# EAGLE board LTC4150_BOB-Panel-v10 (EAGLE 6.5.0), part 1 of 2
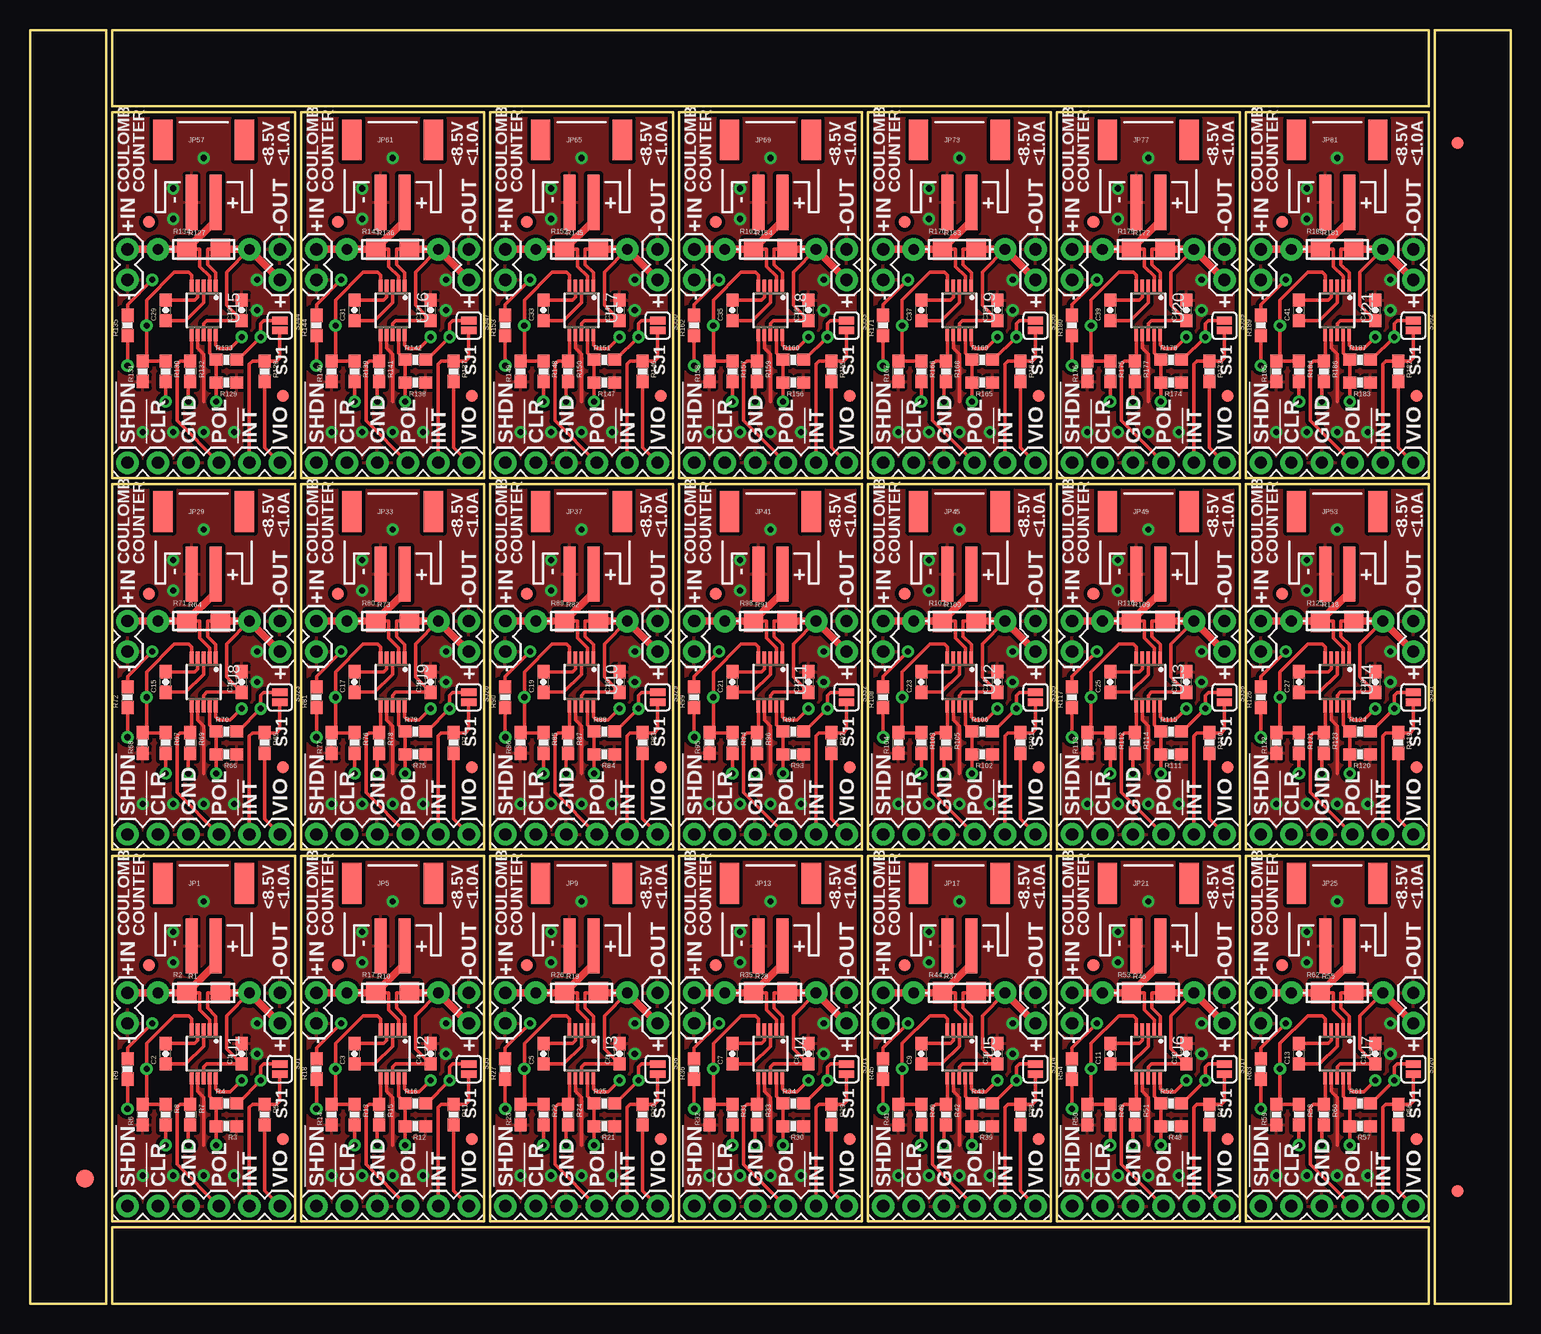
[diagram p0: board, top side]
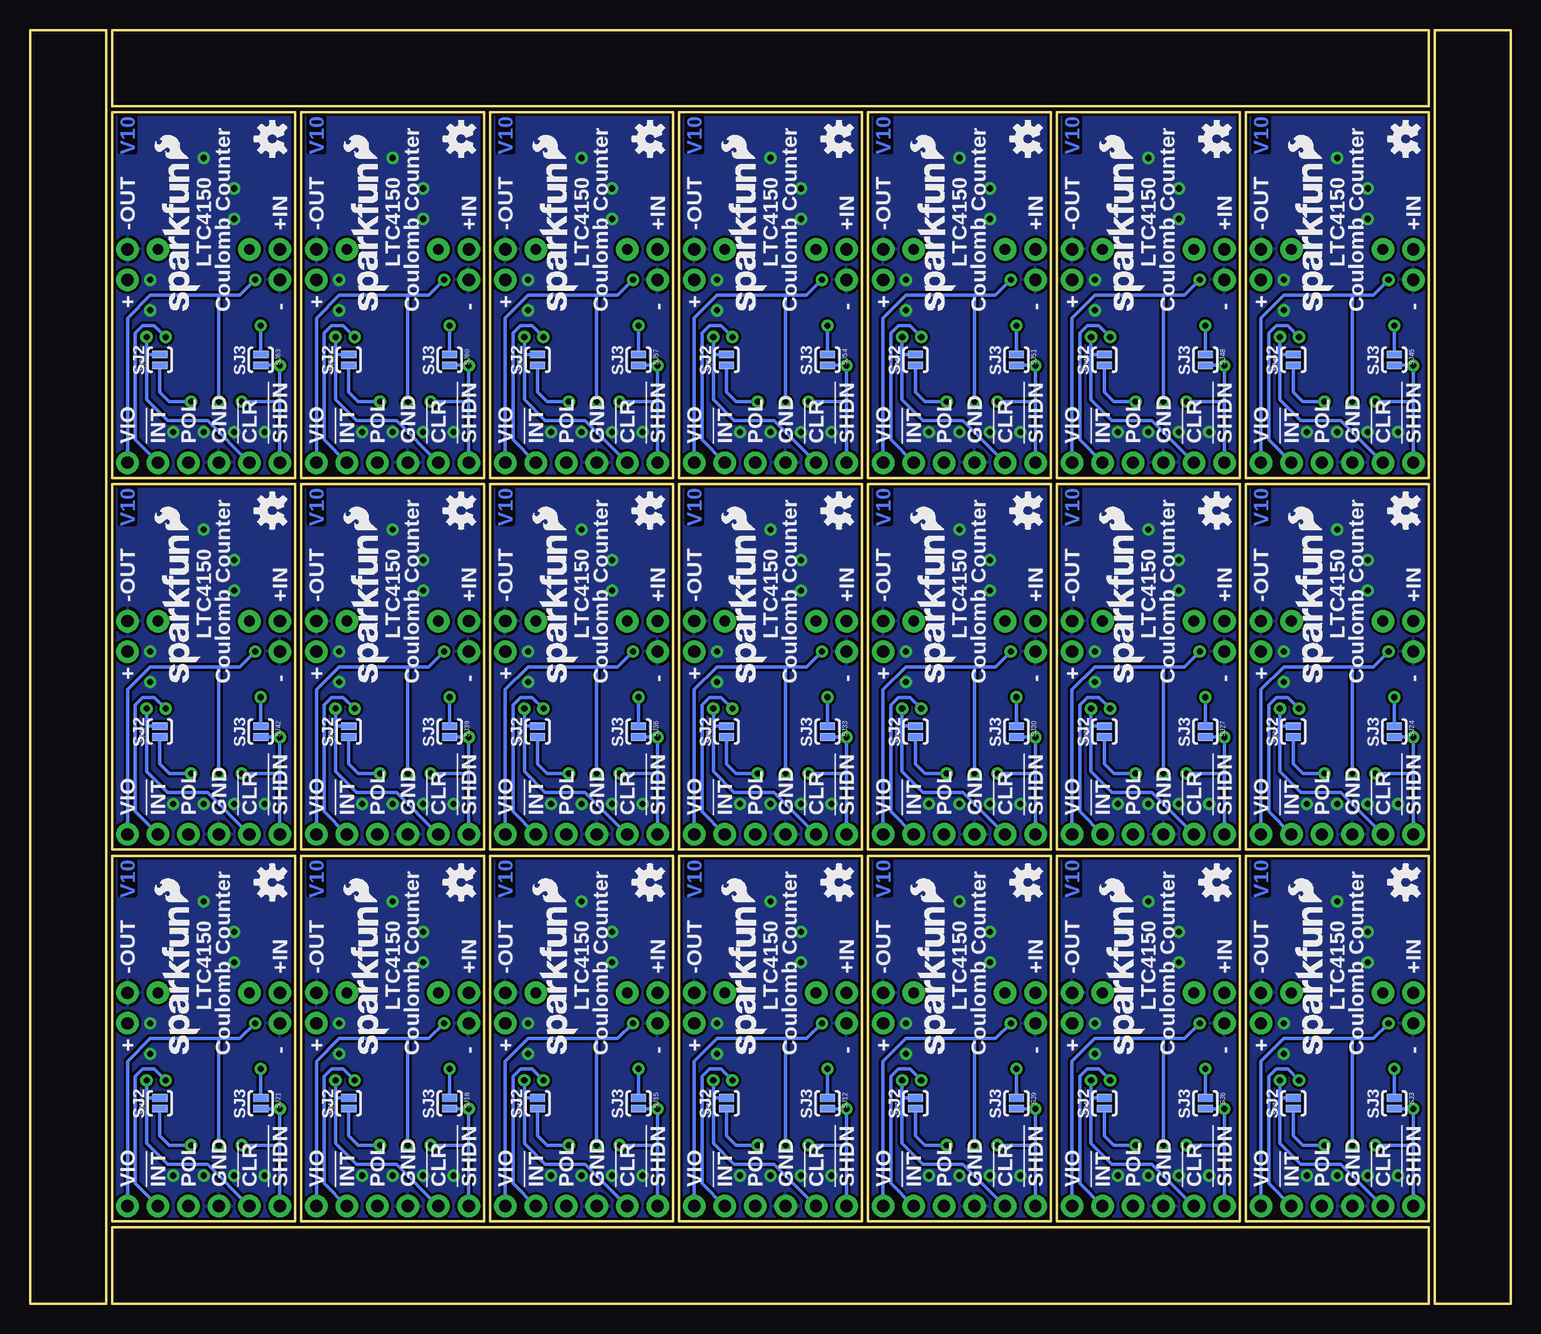
[diagram p1: board, bottom side, seen from below]

Size 123.44 x 106.17 mm. Coordinates in mm from the lower left corner, seen from the top.
Outline: 6.35,79.25 6.35,0 0,0 0,29.72
Outline: 123.44,79.25 123.44,0 117.09,0 117.09,29.72
Outline: 117.09,26.92 117.09,106.17 123.44,106.17 123.44,76.45
Outline: 0,26.92 0,106.17 6.35,106.17 6.35,76.45
Outline: 6.86,6.86 22.1,6.86 22.1,37.34 6.86,37.34 6.86,6.86
Outline: 22.61,6.86 37.85,6.86 37.85,37.34 22.61,37.34 22.61,6.86
Outline: 38.35,6.86 53.59,6.86 53.59,37.34 38.35,37.34 38.35,6.86
Outline: 54.1,6.86 69.34,6.86 69.34,37.34 54.1,37.34 54.1,6.86
Outline: 69.85,6.86 85.09,6.86 85.09,37.34 69.85,37.34 69.85,6.86
Outline: 85.6,6.86 100.84,6.86 100.84,37.34 85.6,37.34 85.6,6.86
Outline: 101.35,6.86 116.59,6.86 116.59,37.34 101.35,37.34 101.35,6.86
Outline: 6.86,37.85 22.1,37.85 22.1,68.33 6.86,68.33 6.86,37.85
Outline: 22.61,37.85 37.85,37.85 37.85,68.33 22.61,68.33 22.61,37.85
Outline: 38.35,37.85 53.59,37.85 53.59,68.33 38.35,68.33 38.35,37.85
Outline: 54.1,37.85 69.34,37.85 69.34,68.33 54.1,68.33 54.1,37.85
Outline: 69.85,37.85 85.09,37.85 85.09,68.33 69.85,68.33 69.85,37.85
Outline: 85.6,37.85 100.84,37.85 100.84,68.33 85.6,68.33 85.6,37.85
Outline: 101.35,37.85 116.59,37.85 116.59,68.33 101.35,68.33 101.35,37.85
Outline: 6.86,68.83 22.1,68.83 22.1,99.31 6.86,99.31 6.86,68.83
Outline: 22.61,68.83 37.85,68.83 37.85,99.31 22.61,99.31 22.61,68.83
Outline: 38.35,68.83 53.59,68.83 53.59,99.31 38.35,99.31 38.35,68.83
Outline: 54.1,68.83 69.34,68.83 69.34,99.31 54.1,99.31 54.1,68.83
Outline: 69.85,68.83 85.09,68.83 85.09,99.31 69.85,99.31 69.85,68.83
Outline: 85.6,68.83 100.84,68.83 100.84,99.31 85.6,99.31 85.6,68.83
Outline: 101.35,68.83 116.59,68.83 116.59,99.31 101.35,99.31 101.35,68.83
Outline: 6.86,0 116.59,0 116.59,6.35 6.86,6.35 6.86,0
Outline: 116.59,106.17 6.86,106.17 6.86,99.82 116.59,99.82 116.59,106.17
Copper layers (1*16): Top 0.035mm / dielectric 1.5mm / Bottom 0.035mm
Design rules "SparkFun *": minimum track width 7mil, minimum drill 15mil, track to track 8mil, track to pad 8mil, pad to pad 8mil, via to via 8mil, smd to smd 8mil, copper to edge 8mil, drill to drill 8mil, minimum pad ring 12mil, minimum via ring 10mil, stop-mask expansion 4mil, vias tented up to drill 20mil, thermal gap 10mil

## Footprints (pad centres in the part's own frame; a part is rotated, then mirrored left to right if it is on the bottom)
0603-CAP = smd 1.1 x 1: 1 -0.85,0; 2 0.85,0
FIDUCIAL-1.5X3 = smd 1.5 x 1.5: 1 0,0
FIDUCIAL-1X2 = smd 1 x 1: 1 0,0
JST-2-SMD = smd 1 x 4.6: 1 -1,-3.7; 2 1,-3.7 | smd 1.6 x 3.4: NC1 -3.4,1.5; NC2 3.4,1.5
1X02 = drill 1.016 pad 1.88: 1 0,0; 2 2.54,0
1X06 = drill 1.016 pad 1.88: 1 0,0; 2 2.54,0; 3 5.08,0; 4 7.62,0; 5 10.16,0; 6 12.7,0
1206 = smd 1.6 x 1.8: 1 -1.4,0; 2 1.4,0
AXIAL-0.3 = drill 0.9 pad 1.88: P$1 -3.81,0; P$2 3.81,0
0603-RES = smd 1.1 x 1: 1 -0.85,0; 2 0.85,0
SJ_2S = smd 0.635 x 1.27: 1 -0.412,0; 2 0.412,0
SJ_2S-NO = smd 0.635 x 1.27: 1 -0.45,0; 2 0.45,0
MSOP10 = smd 0.3 x 1: 1 -1,-2.05; 2 -0.5,-2.05; 3 0,-2.05; 4 0.5,-2.05; 5 1,-2.05; 6 1,2.05; 7 0.5,2.05; 8 0,2.05; 9 -0.5,2.05; 10 -1,2.05

## Placement (x,y rotation side)
C1  4.7uF  [0603-CAP]  17.65,20.83 90 top
C2  4.7uF  [0603-CAP]  11.3,20.83 90 top
C3  4.7uF  [0603-CAP]  27.05,20.83 90 top
C4  4.7uF  [0603-CAP]  33.4,20.83 90 top
C5  4.7uF  [0603-CAP]  42.8,20.83 90 top
C6  4.7uF  [0603-CAP]  49.15,20.83 90 top
C7  4.7uF  [0603-CAP]  58.55,20.83 90 top
C8  4.7uF  [0603-CAP]  64.9,20.83 90 top
C9  4.7uF  [0603-CAP]  74.3,20.83 90 top
C10  4.7uF  [0603-CAP]  80.64,20.83 90 top
C11  4.7uF  [0603-CAP]  90.04,20.83 90 top
C12  4.7uF  [0603-CAP]  96.39,20.83 90 top
C13  4.7uF  [0603-CAP]  105.79,20.83 90 top
C14  4.7uF  [0603-CAP]  112.14,20.83 90 top
C15  4.7uF  [0603-CAP]  11.3,51.82 90 top
C16  4.7uF  [0603-CAP]  17.65,51.82 90 top
C17  4.7uF  [0603-CAP]  27.05,51.82 90 top
C18  4.7uF  [0603-CAP]  33.4,51.82 90 top
C19  4.7uF  [0603-CAP]  42.8,51.82 90 top
C20  4.7uF  [0603-CAP]  49.15,51.82 90 top
C21  4.7uF  [0603-CAP]  58.55,51.82 90 top
C22  4.7uF  [0603-CAP]  64.9,51.82 90 top
C23  4.7uF  [0603-CAP]  74.3,51.82 90 top
C24  4.7uF  [0603-CAP]  80.64,51.82 90 top
C25  4.7uF  [0603-CAP]  90.04,51.82 90 top
C26  4.7uF  [0603-CAP]  96.39,51.82 90 top
C27  4.7uF  [0603-CAP]  105.79,51.82 90 top
C28  4.7uF  [0603-CAP]  112.14,51.82 90 top
C29  4.7uF  [0603-CAP]  11.3,82.8 90 top
C30  4.7uF  [0603-CAP]  17.65,82.8 90 top
C31  4.7uF  [0603-CAP]  27.05,82.8 90 top
C32  4.7uF  [0603-CAP]  33.4,82.8 90 top
C33  4.7uF  [0603-CAP]  42.8,82.8 90 top
C34  4.7uF  [0603-CAP]  49.15,82.8 90 top
C35  4.7uF  [0603-CAP]  58.55,82.8 90 top
C36  4.7uF  [0603-CAP]  64.9,82.8 90 top
C37  4.7uF  [0603-CAP]  74.3,82.8 90 top
C38  4.7uF  [0603-CAP]  80.64,82.8 90 top
C39  4.7uF  [0603-CAP]  90.04,82.8 90 top
C40  4.7uF  [0603-CAP]  96.39,82.8 90 top
C41  4.7uF  [0603-CAP]  105.79,82.8 90 top
C42  4.7uF  [0603-CAP]  112.14,82.8 90 top
E$1  [FIDUCIAL-1.5X3]  4.57,10.41 0 top
E$4  [FIDUCIAL-1X2]  119,9.4 0 top
E$5  [FIDUCIAL-1X2]  119,96.77 180 top
FID1  FIDUCIAL1X2  [FIDUCIAL-1X2]  9.91,28.19 0 top
FID2  FIDUCIAL1X2  [FIDUCIAL-1X2]  21.08,13.72 0 top
FID3  FIDUCIAL1X2  [FIDUCIAL-1X2]  25.65,28.19 0 top
FID4  FIDUCIAL1X2  [FIDUCIAL-1X2]  36.83,13.72 0 top
FID5  FIDUCIAL1X2  [FIDUCIAL-1X2]  41.4,28.19 0 top
FID6  FIDUCIAL1X2  [FIDUCIAL-1X2]  52.58,13.72 0 top
FID7  FIDUCIAL1X2  [FIDUCIAL-1X2]  57.15,28.19 0 top
FID8  FIDUCIAL1X2  [FIDUCIAL-1X2]  68.33,13.72 0 top
FID9  FIDUCIAL1X2  [FIDUCIAL-1X2]  72.9,28.19 0 top
FID10  FIDUCIAL1X2  [FIDUCIAL-1X2]  84.07,13.72 0 top
FID11  FIDUCIAL1X2  [FIDUCIAL-1X2]  88.65,28.19 0 top
FID12  FIDUCIAL1X2  [FIDUCIAL-1X2]  99.82,13.72 0 top
FID13  FIDUCIAL1X2  [FIDUCIAL-1X2]  104.39,28.19 0 top
FID14  FIDUCIAL1X2  [FIDUCIAL-1X2]  115.57,13.72 0 top
FID15  FIDUCIAL1X2  [FIDUCIAL-1X2]  9.91,59.18 0 top
FID16  FIDUCIAL1X2  [FIDUCIAL-1X2]  21.08,44.7 0 top
FID17  FIDUCIAL1X2  [FIDUCIAL-1X2]  25.65,59.18 0 top
FID18  FIDUCIAL1X2  [FIDUCIAL-1X2]  36.83,44.7 0 top
FID19  FIDUCIAL1X2  [FIDUCIAL-1X2]  41.4,59.18 0 top
FID20  FIDUCIAL1X2  [FIDUCIAL-1X2]  52.58,44.7 0 top
FID21  FIDUCIAL1X2  [FIDUCIAL-1X2]  57.15,59.18 0 top
FID22  FIDUCIAL1X2  [FIDUCIAL-1X2]  68.33,44.7 0 top
FID23  FIDUCIAL1X2  [FIDUCIAL-1X2]  72.9,59.18 0 top
FID24  FIDUCIAL1X2  [FIDUCIAL-1X2]  84.07,44.7 0 top
FID25  FIDUCIAL1X2  [FIDUCIAL-1X2]  88.65,59.18 0 top
FID26  FIDUCIAL1X2  [FIDUCIAL-1X2]  99.82,44.7 0 top
FID27  FIDUCIAL1X2  [FIDUCIAL-1X2]  104.39,59.18 0 top
FID28  FIDUCIAL1X2  [FIDUCIAL-1X2]  115.57,44.7 0 top
FID29  FIDUCIAL1X2  [FIDUCIAL-1X2]  9.91,90.17 0 top
FID30  FIDUCIAL1X2  [FIDUCIAL-1X2]  21.08,75.69 0 top
FID31  FIDUCIAL1X2  [FIDUCIAL-1X2]  25.65,90.17 0 top
FID32  FIDUCIAL1X2  [FIDUCIAL-1X2]  36.83,75.69 0 top
FID33  FIDUCIAL1X2  [FIDUCIAL-1X2]  41.4,90.17 0 top
FID34  FIDUCIAL1X2  [FIDUCIAL-1X2]  52.58,75.69 0 top
FID35  FIDUCIAL1X2  [FIDUCIAL-1X2]  57.15,90.17 0 top
FID36  FIDUCIAL1X2  [FIDUCIAL-1X2]  68.33,75.69 0 top
FID37  FIDUCIAL1X2  [FIDUCIAL-1X2]  72.9,90.17 0 top
FID38  FIDUCIAL1X2  [FIDUCIAL-1X2]  84.07,75.69 0 top
FID39  FIDUCIAL1X2  [FIDUCIAL-1X2]  88.65,90.17 0 top
FID40  FIDUCIAL1X2  [FIDUCIAL-1X2]  99.82,75.69 0 top
FID41  FIDUCIAL1X2  [FIDUCIAL-1X2]  104.39,90.17 0 top
FID42  FIDUCIAL1X2  [FIDUCIAL-1X2]  115.57,75.69 0 top
JP1  JST  [JST-2-SMD]  14.48,33.53 0 top
JP2  IN  [1X02]  8.13,23.37 90 top
JP3  OUT  [1X02]  20.83,25.91 270 top
JP4  [1X06]  20.83,8.13 180 top
JP5  JST  [JST-2-SMD]  30.23,33.53 0 top
JP6  IN  [1X02]  23.88,23.37 90 top
JP7  OUT  [1X02]  36.58,25.91 270 top
JP8  [1X06]  36.58,8.13 180 top
JP9  JST  [JST-2-SMD]  45.97,33.53 0 top
JP10  IN  [1X02]  39.62,23.37 90 top
JP11  OUT  [1X02]  52.32,25.91 270 top
JP12  [1X06]  52.32,8.13 180 top
JP13  JST  [JST-2-SMD]  61.72,33.53 0 top
JP14  IN  [1X02]  55.37,23.37 90 top
JP15  OUT  [1X02]  68.07,25.91 270 top
JP16  [1X06]  68.07,8.13 180 top
JP17  JST  [JST-2-SMD]  77.47,33.53 0 top
JP18  IN  [1X02]  71.12,23.37 90 top
JP19  OUT  [1X02]  83.82,25.91 270 top
JP20  [1X06]  83.82,8.13 180 top
JP21  JST  [JST-2-SMD]  93.22,33.53 0 top
JP22  IN  [1X02]  86.87,23.37 90 top
JP23  OUT  [1X02]  99.57,25.91 270 top
JP24  [1X06]  99.57,8.13 180 top
JP25  JST  [JST-2-SMD]  108.97,33.53 0 top
JP26  IN  [1X02]  102.62,23.37 90 top
JP27  OUT  [1X02]  115.32,25.91 270 top
JP28  [1X06]  115.32,8.13 180 top
JP29  JST  [JST-2-SMD]  14.48,64.52 0 top
JP30  IN  [1X02]  8.13,54.36 90 top
JP31  OUT  [1X02]  20.83,56.9 270 top
JP32  [1X06]  20.83,39.12 180 top
JP33  JST  [JST-2-SMD]  30.23,64.52 0 top
JP34  IN  [1X02]  23.88,54.36 90 top
JP35  OUT  [1X02]  36.58,56.9 270 top
JP36  [1X06]  36.58,39.12 180 top
JP37  JST  [JST-2-SMD]  45.97,64.52 0 top
JP38  IN  [1X02]  39.62,54.36 90 top
JP39  OUT  [1X02]  52.32,56.9 270 top
JP40  [1X06]  52.32,39.12 180 top
JP41  JST  [JST-2-SMD]  61.72,64.52 0 top
JP42  IN  [1X02]  55.37,54.36 90 top
JP43  OUT  [1X02]  68.07,56.9 270 top
JP44  [1X06]  68.07,39.12 180 top
JP45  JST  [JST-2-SMD]  77.47,64.52 0 top
JP46  IN  [1X02]  71.12,54.36 90 top
JP47  OUT  [1X02]  83.82,56.9 270 top
JP48  [1X06]  83.82,39.12 180 top
JP49  JST  [JST-2-SMD]  93.22,64.52 0 top
JP50  IN  [1X02]  86.87,54.36 90 top
JP51  OUT  [1X02]  99.57,56.9 270 top
JP52  [1X06]  99.57,39.12 180 top
JP53  JST  [JST-2-SMD]  108.97,64.52 0 top
JP54  IN  [1X02]  102.62,54.36 90 top
JP55  OUT  [1X02]  115.32,56.9 270 top
JP56  [1X06]  115.32,39.12 180 top
JP57  JST  [JST-2-SMD]  14.48,95.5 0 top
JP58  IN  [1X02]  8.13,85.34 90 top
JP59  OUT  [1X02]  20.83,87.88 270 top
JP60  [1X06]  20.83,70.1 180 top
JP61  JST  [JST-2-SMD]  30.23,95.5 0 top
JP62  IN  [1X02]  23.88,85.34 90 top
JP63  OUT  [1X02]  36.58,87.88 270 top
JP64  [1X06]  36.58,70.1 180 top
JP65  JST  [JST-2-SMD]  45.97,95.5 0 top
JP66  IN  [1X02]  39.62,85.34 90 top
JP67  OUT  [1X02]  52.32,87.88 270 top
JP68  [1X06]  52.32,70.1 180 top
JP69  JST  [JST-2-SMD]  61.72,95.5 0 top
JP70  IN  [1X02]  55.37,85.34 90 top
JP71  OUT  [1X02]  68.07,87.88 270 top
JP72  [1X06]  68.07,70.1 180 top
JP73  JST  [JST-2-SMD]  77.47,95.5 0 top
JP74  IN  [1X02]  71.12,85.34 90 top
JP75  OUT  [1X02]  83.82,87.88 270 top
JP76  [1X06]  83.82,70.1 180 top
JP77  JST  [JST-2-SMD]  93.22,95.5 0 top
JP78  IN  [1X02]  86.87,85.34 90 top
JP79  OUT  [1X02]  99.57,87.88 270 top
JP80  [1X06]  99.57,70.1 180 top
JP81  JST  [JST-2-SMD]  108.97,95.5 0 top
JP82  IN  [1X02]  102.62,85.34 90 top
JP83  OUT  [1X02]  115.32,87.88 270 top
JP84  [1X06]  115.32,70.1 180 top
LOGO1  OSHW-LOGOS  [OSHW-LOGO-S]  8.76,35.12 90 bottom
LOGO2  LOGO-SFENW2  [SFE-NEW-WEB]  14.8,20.83 90 bottom
LOGO3  LOGO-SFESK  [SFE-LOGO-FLAME]  15.75,33.53 90 bottom
LOGO4  LOGO-SFESK  [SFE-LOGO-FLAME]  31.5,33.53 90 bottom
LOGO5  OSHW-LOGOS  [OSHW-LOGO-S]  24.51,35.12 90 bottom
LOGO6  LOGO-SFENW2  [SFE-NEW-WEB]  30.54,20.83 90 bottom
LOGO7  LOGO-SFESK  [SFE-LOGO-FLAME]  47.24,33.53 90 bottom
LOGO8  OSHW-LOGOS  [OSHW-LOGO-S]  40.26,35.12 90 bottom
LOGO9  LOGO-SFENW2  [SFE-NEW-WEB]  46.29,20.83 90 bottom
LOGO10  LOGO-SFESK  [SFE-LOGO-FLAME]  62.99,33.53 90 bottom
LOGO11  OSHW-LOGOS  [OSHW-LOGO-S]  56.01,35.12 90 bottom
LOGO12  LOGO-SFENW2  [SFE-NEW-WEB]  62.04,20.83 90 bottom
LOGO13  LOGO-SFESK  [SFE-LOGO-FLAME]  78.74,33.53 90 bottom
LOGO14  OSHW-LOGOS  [OSHW-LOGO-S]  71.75,35.12 90 bottom
LOGO15  LOGO-SFENW2  [SFE-NEW-WEB]  77.79,20.83 90 bottom
LOGO16  LOGO-SFESK  [SFE-LOGO-FLAME]  94.49,33.53 90 bottom
LOGO17  OSHW-LOGOS  [OSHW-LOGO-S]  87.5,35.12 90 bottom
LOGO18  LOGO-SFENW2  [SFE-NEW-WEB]  93.54,20.83 90 bottom
LOGO19  LOGO-SFESK  [SFE-LOGO-FLAME]  110.24,33.53 90 bottom
LOGO20  OSHW-LOGOS  [OSHW-LOGO-S]  103.25,35.12 90 bottom
LOGO21  LOGO-SFENW2  [SFE-NEW-WEB]  109.28,20.83 90 bottom
LOGO22  LOGO-SFESK  [SFE-LOGO-FLAME]  15.75,64.52 90 bottom
LOGO23  OSHW-LOGOS  [OSHW-LOGO-S]  8.76,66.1 90 bottom
LOGO24  LOGO-SFENW2  [SFE-NEW-WEB]  14.8,51.82 90 bottom
LOGO25  LOGO-SFESK  [SFE-LOGO-FLAME]  31.5,64.52 90 bottom
LOGO26  OSHW-LOGOS  [OSHW-LOGO-S]  24.51,66.1 90 bottom
LOGO27  LOGO-SFENW2  [SFE-NEW-WEB]  30.54,51.82 90 bottom
LOGO28  LOGO-SFESK  [SFE-LOGO-FLAME]  47.24,64.52 90 bottom
LOGO29  OSHW-LOGOS  [OSHW-LOGO-S]  40.26,66.1 90 bottom
LOGO30  LOGO-SFENW2  [SFE-NEW-WEB]  46.29,51.82 90 bottom
LOGO31  LOGO-SFESK  [SFE-LOGO-FLAME]  62.99,64.52 90 bottom
LOGO32  OSHW-LOGOS  [OSHW-LOGO-S]  56.01,66.1 90 bottom
LOGO33  LOGO-SFENW2  [SFE-NEW-WEB]  62.04,51.82 90 bottom
LOGO34  LOGO-SFESK  [SFE-LOGO-FLAME]  78.74,64.52 90 bottom
LOGO35  OSHW-LOGOS  [OSHW-LOGO-S]  71.75,66.1 90 bottom
LOGO36  LOGO-SFENW2  [SFE-NEW-WEB]  77.79,51.82 90 bottom
LOGO37  LOGO-SFESK  [SFE-LOGO-FLAME]  94.49,64.52 90 bottom
LOGO38  OSHW-LOGOS  [OSHW-LOGO-S]  87.5,66.1 90 bottom
LOGO39  LOGO-SFENW2  [SFE-NEW-WEB]  93.54,51.82 90 bottom
LOGO40  LOGO-SFESK  [SFE-LOGO-FLAME]  110.24,64.52 90 bottom
LOGO41  OSHW-LOGOS  [OSHW-LOGO-S]  103.25,66.1 90 bottom
LOGO42  LOGO-SFENW2  [SFE-NEW-WEB]  109.28,51.82 90 bottom
LOGO43  LOGO-SFESK  [SFE-LOGO-FLAME]  15.75,95.5 90 bottom
LOGO44  OSHW-LOGOS  [OSHW-LOGO-S]  8.76,97.09 90 bottom
LOGO45  LOGO-SFENW2  [SFE-NEW-WEB]  14.8,82.8 90 bottom
LOGO46  LOGO-SFESK  [SFE-LOGO-FLAME]  31.5,95.5 90 bottom
LOGO47  OSHW-LOGOS  [OSHW-LOGO-S]  24.51,97.09 90 bottom
LOGO48  LOGO-SFENW2  [SFE-NEW-WEB]  30.54,82.8 90 bottom
LOGO49  LOGO-SFESK  [SFE-LOGO-FLAME]  47.24,95.5 90 bottom
LOGO50  OSHW-LOGOS  [OSHW-LOGO-S]  40.26,97.09 90 bottom
LOGO51  LOGO-SFENW2  [SFE-NEW-WEB]  46.29,82.8 90 bottom
LOGO52  LOGO-SFESK  [SFE-LOGO-FLAME]  62.99,95.5 90 bottom
LOGO53  OSHW-LOGOS  [OSHW-LOGO-S]  56.01,97.09 90 bottom
LOGO54  LOGO-SFENW2  [SFE-NEW-WEB]  62.04,82.8 90 bottom
LOGO55  LOGO-SFESK  [SFE-LOGO-FLAME]  78.74,95.5 90 bottom
LOGO56  OSHW-LOGOS  [OSHW-LOGO-S]  71.75,97.09 90 bottom
LOGO57  LOGO-SFENW2  [SFE-NEW-WEB]  77.79,82.8 90 bottom
LOGO58  LOGO-SFESK  [SFE-LOGO-FLAME]  94.49,95.5 90 bottom
LOGO59  OSHW-LOGOS  [OSHW-LOGO-S]  87.5,97.09 90 bottom
LOGO60  LOGO-SFENW2  [SFE-NEW-WEB]  93.54,82.8 90 bottom
LOGO61  LOGO-SFESK  [SFE-LOGO-FLAME]  110.24,95.5 90 bottom
LOGO62  OSHW-LOGOS  [OSHW-LOGO-S]  103.25,97.09 90 bottom
LOGO63  LOGO-SFENW2  [SFE-NEW-WEB]  109.28,82.8 90 bottom
R1  0.05  [1206]  14.48,25.91 0 top
R2  DNP  [AXIAL-0.3]  14.48,25.91 0 top
R3  75K  [0603-RES]  16.38,14.8 180 top
R4  47K  [0603-RES]  16.38,16.7 0 top
R5  3.3K  [0603-RES]  19.56,15.75 270 top
R6  75K  [0603-RES]  9.4,15.75 90 top
R7  3.3K  [0603-RES]  13.37,15.75 270 top
R8  47K  [0603-RES]  11.3,15.75 270 top
R9  3.3K  [0603-RES]  8.13,19.56 90 top
R10  0.05  [1206]  30.23,25.91 0 top
R11  3.3K  [0603-RES]  35.31,15.75 270 top
R12  75K  [0603-RES]  32.13,14.8 180 top
R13  47K  [0603-RES]  27.05,15.75 270 top
R14  75K  [0603-RES]  25.15,15.75 90 top
R15  3.3K  [0603-RES]  29.11,15.75 270 top
R16  47K  [0603-RES]  32.13,16.7 0 top
R17  DNP  [AXIAL-0.3]  30.23,25.91 0 top
R18  3.3K  [0603-RES]  23.88,19.56 90 top
R19  0.05  [1206]  45.97,25.91 0 top
R20  3.3K  [0603-RES]  51.05,15.75 270 top
R21  75K  [0603-RES]  47.88,14.8 180 top
R22  47K  [0603-RES]  42.8,15.75 270 top
R23  75K  [0603-RES]  40.89,15.75 90 top
R24  3.3K  [0603-RES]  44.86,15.75 270 top
R25  47K  [0603-RES]  47.88,16.7 0 top
R26  DNP  [AXIAL-0.3]  45.97,25.91 0 top
R27  3.3K  [0603-RES]  39.62,19.56 90 top
R28  0.05  [1206]  61.72,25.91 0 top
R29  3.3K  [0603-RES]  66.8,15.75 270 top
R30  75K  [0603-RES]  63.63,14.8 180 top
R31  47K  [0603-RES]  58.55,15.75 270 top
R32  75K  [0603-RES]  56.64,15.75 90 top
R33  3.3K  [0603-RES]  60.61,15.75 270 top
R34  47K  [0603-RES]  63.63,16.7 0 top
R35  DNP  [AXIAL-0.3]  61.72,25.91 0 top
R36  3.3K  [0603-RES]  55.37,19.56 90 top
R37  0.05  [1206]  77.47,25.91 0 top
R38  3.3K  [0603-RES]  82.55,15.75 270 top
R39  75K  [0603-RES]  79.38,14.8 180 top
R40  47K  [0603-RES]  74.3,15.75 270 top
R41  75K  [0603-RES]  72.39,15.75 90 top
R42  3.3K  [0603-RES]  76.36,15.75 270 top
R43  47K  [0603-RES]  79.38,16.7 0 top
R44  DNP  [AXIAL-0.3]  77.47,25.91 0 top
R45  3.3K  [0603-RES]  71.12,19.56 90 top
R46  0.05  [1206]  93.22,25.91 0 top
R47  3.3K  [0603-RES]  98.3,15.75 270 top
R48  75K  [0603-RES]  95.12,14.8 180 top
R49  47K  [0603-RES]  90.04,15.75 270 top
R50  75K  [0603-RES]  88.14,15.75 90 top
R51  3.3K  [0603-RES]  92.11,15.75 270 top
R52  47K  [0603-RES]  95.12,16.7 0 top
R53  DNP  [AXIAL-0.3]  93.22,25.91 0 top
R54  3.3K  [0603-RES]  86.87,19.56 90 top
R55  0.05  [1206]  108.97,25.91 0 top
R56  3.3K  [0603-RES]  114.05,15.75 270 top
R57  75K  [0603-RES]  110.87,14.8 180 top
R58  47K  [0603-RES]  105.79,15.75 270 top
R59  75K  [0603-RES]  103.89,15.75 90 top
R60  3.3K  [0603-RES]  107.85,15.75 270 top
R61  47K  [0603-RES]  110.87,16.7 0 top
R62  DNP  [AXIAL-0.3]  108.97,25.91 0 top
R63  3.3K  [0603-RES]  102.62,19.56 90 top
R64  0.05  [1206]  14.48,56.9 0 top
R65  3.3K  [0603-RES]  19.56,46.74 270 top
R66  75K  [0603-RES]  16.38,45.78 180 top
R67  47K  [0603-RES]  11.3,46.74 270 top
R68  75K  [0603-RES]  9.4,46.74 90 top
R69  3.3K  [0603-RES]  13.37,46.74 270 top
R70  47K  [0603-RES]  16.38,47.69 0 top
R71  DNP  [AXIAL-0.3]  14.48,56.9 0 top
R72  3.3K  [0603-RES]  8.13,50.55 90 top
R73  0.05  [1206]  30.23,56.9 0 top
R74  3.3K  [0603-RES]  35.31,46.74 270 top
R75  75K  [0603-RES]  32.13,45.78 180 top
R76  47K  [0603-RES]  27.05,46.74 270 top
R77  75K  [0603-RES]  25.15,46.74 90 top
R78  3.3K  [0603-RES]  29.11,46.74 270 top
R79  47K  [0603-RES]  32.13,47.69 0 top
R80  DNP  [AXIAL-0.3]  30.23,56.9 0 top
R81  3.3K  [0603-RES]  23.88,50.55 90 top
R82  0.05  [1206]  45.97,56.9 0 top
R83  3.3K  [0603-RES]  51.05,46.74 270 top
R84  75K  [0603-RES]  47.88,45.78 180 top
R85  47K  [0603-RES]  42.8,46.74 270 top
R86  75K  [0603-RES]  40.89,46.74 90 top
R87  3.3K  [0603-RES]  44.86,46.74 270 top
R88  47K  [0603-RES]  47.88,47.69 0 top
R89  DNP  [AXIAL-0.3]  45.97,56.9 0 top
R90  3.3K  [0603-RES]  39.62,50.55 90 top
R91  0.05  [1206]  61.72,56.9 0 top
R92  3.3K  [0603-RES]  66.8,46.74 270 top
R93  75K  [0603-RES]  63.63,45.78 180 top
R94  47K  [0603-RES]  58.55,46.74 270 top
R95  75K  [0603-RES]  56.64,46.74 90 top
R96  3.3K  [0603-RES]  60.61,46.74 270 top
R97  47K  [0603-RES]  63.63,47.69 0 top
R98  DNP  [AXIAL-0.3]  61.72,56.9 0 top
R99  3.3K  [0603-RES]  55.37,50.55 90 top
R100  0.05  [1206]  77.47,56.9 0 top
R101  3.3K  [0603-RES]  82.55,46.74 270 top
R102  75K  [0603-RES]  79.38,45.78 180 top
R103  47K  [0603-RES]  74.3,46.74 270 top
R104  75K  [0603-RES]  72.39,46.74 90 top
R105  3.3K  [0603-RES]  76.36,46.74 270 top
R106  47K  [0603-RES]  79.38,47.69 0 top
R107  DNP  [AXIAL-0.3]  77.47,56.9 0 top
R108  3.3K  [0603-RES]  71.12,50.55 90 top
R109  0.05  [1206]  93.22,56.9 0 top
R110  3.3K  [0603-RES]  98.3,46.74 270 top
R111  75K  [0603-RES]  95.12,45.78 180 top
R112  47K  [0603-RES]  90.04,46.74 270 top
R113  75K  [0603-RES]  88.14,46.74 90 top
R114  3.3K  [0603-RES]  92.11,46.74 270 top
R115  47K  [0603-RES]  95.12,47.69 0 top
R116  DNP  [AXIAL-0.3]  93.22,56.9 0 top
R117  3.3K  [0603-RES]  86.87,50.55 90 top
R118  0.05  [1206]  108.97,56.9 0 top
R119  3.3K  [0603-RES]  114.05,46.74 270 top
R120  75K  [0603-RES]  110.87,45.78 180 top
R121  47K  [0603-RES]  105.79,46.74 270 top
R122  75K  [0603-RES]  103.89,46.74 90 top
R123  3.3K  [0603-RES]  107.85,46.74 270 top
R124  47K  [0603-RES]  110.87,47.69 0 top
R125  DNP  [AXIAL-0.3]  108.97,56.9 0 top
R126  3.3K  [0603-RES]  102.62,50.55 90 top
R127  0.05  [1206]  14.48,87.88 0 top
R128  3.3K  [0603-RES]  19.56,77.72 270 top
R129  75K  [0603-RES]  16.38,76.77 180 top
R130  47K  [0603-RES]  11.3,77.72 270 top
R131  75K  [0603-RES]  9.4,77.72 90 top
R132  3.3K  [0603-RES]  13.37,77.72 270 top
R133  47K  [0603-RES]  16.38,78.68 0 top
R134  DNP  [AXIAL-0.3]  14.48,87.88 0 top
R135  3.3K  [0603-RES]  8.13,81.53 90 top
R136  0.05  [1206]  30.23,87.88 0 top
R137  3.3K  [0603-RES]  35.31,77.72 270 top
R138  75K  [0603-RES]  32.13,76.77 180 top
R139  47K  [0603-RES]  27.05,77.72 270 top
R140  75K  [0603-RES]  25.15,77.72 90 top
R141  3.3K  [0603-RES]  29.11,77.72 270 top
R142  47K  [0603-RES]  32.13,78.68 0 top
R143  DNP  [AXIAL-0.3]  30.23,87.88 0 top
R144  3.3K  [0603-RES]  23.88,81.53 90 top
R145  0.05  [1206]  45.97,87.88 0 top
R146  3.3K  [0603-RES]  51.05,77.72 270 top
R147  75K  [0603-RES]  47.88,76.77 180 top
R148  47K  [0603-RES]  42.8,77.72 270 top
R149  75K  [0603-RES]  40.89,77.72 90 top
R150  3.3K  [0603-RES]  44.86,77.72 270 top
R151  47K  [0603-RES]  47.88,78.68 0 top
R152  DNP  [AXIAL-0.3]  45.97,87.88 0 top
R153  3.3K  [0603-RES]  39.62,81.53 90 top
R154  0.05  [1206]  61.72,87.88 0 top
R155  3.3K  [0603-RES]  66.8,77.72 270 top
R156  75K  [0603-RES]  63.63,76.77 180 top
R157  47K  [0603-RES]  58.55,77.72 270 top
R158  75K  [0603-RES]  56.64,77.72 90 top
R159  3.3K  [0603-RES]  60.61,77.72 270 top
R160  47K  [0603-RES]  63.63,78.68 0 top
R161  DNP  [AXIAL-0.3]  61.72,87.88 0 top
R162  3.3K  [0603-RES]  55.37,81.53 90 top
R163  0.05  [1206]  77.47,87.88 0 top
R164  3.3K  [0603-RES]  82.55,77.72 270 top
R165  75K  [0603-RES]  79.38,76.77 180 top
R166  47K  [0603-RES]  74.3,77.72 270 top
R167  75K  [0603-RES]  72.39,77.72 90 top
R168  3.3K  [0603-RES]  76.36,77.72 270 top
R169  47K  [0603-RES]  79.38,78.68 0 top
R170  DNP  [AXIAL-0.3]  77.47,87.88 0 top
R171  3.3K  [0603-RES]  71.12,81.53 90 top
R172  0.05  [1206]  93.22,87.88 0 top
R173  3.3K  [0603-RES]  98.3,77.72 270 top
R174  75K  [0603-RES]  95.12,76.77 180 top
R175  47K  [0603-RES]  90.04,77.72 270 top
R176  75K  [0603-RES]  88.14,77.72 90 top
R177  3.3K  [0603-RES]  92.11,77.72 270 top
R178  47K  [0603-RES]  95.12,78.68 0 top
R179  DNP  [AXIAL-0.3]  93.22,87.88 0 top
R180  3.3K  [0603-RES]  86.87,81.53 90 top
R181  0.05  [1206]  108.97,87.88 0 top
R182  3.3K  [0603-RES]  114.05,77.72 270 top
R183  75K  [0603-RES]  110.87,76.77 180 top
R184  47K  [0603-RES]  105.79,77.72 270 top
R185  75K  [0603-RES]  103.89,77.72 90 top
R186  3.3K  [0603-RES]  107.85,77.72 270 top
R187  47K  [0603-RES]  110.87,78.68 0 top
R188  DNP  [AXIAL-0.3]  108.97,87.88 0 top
R189  3.3K  [0603-RES]  102.62,81.53 90 top
SJ1  [SJ_2S]  20.83,19.56 270 top
SJ2  [SJ_2S-NO]  18.13,16.7 90 bottom
SJ3  [SJ_2S-NO]  9.72,16.7 270 bottom
SJ4  [SJ_2S-NO]  33.88,16.7 90 bottom
SJ5  [SJ_2S]  36.58,19.56 270 top
SJ6  [SJ_2S-NO]  25.46,16.7 270 bottom
SJ7  [SJ_2S-NO]  49.63,16.7 90 bottom
SJ8  [SJ_2S]  52.32,19.56 270 top
SJ9  [SJ_2S-NO]  41.21,16.7 270 bottom
SJ10  [SJ_2S-NO]  65.37,16.7 90 bottom
SJ11  [SJ_2S]  68.07,19.56 270 top
SJ12  [SJ_2S-NO]  56.96,16.7 270 bottom
SJ13  [SJ_2S-NO]  81.12,16.7 90 bottom
SJ14  [SJ_2S]  83.82,19.56 270 top
SJ15  [SJ_2S-NO]  72.71,16.7 270 bottom
SJ16  [SJ_2S-NO]  96.87,16.7 90 bottom
SJ17  [SJ_2S]  99.57,19.56 270 top
SJ18  [SJ_2S-NO]  88.46,16.7 270 bottom
SJ19  [SJ_2S-NO]  112.62,16.7 90 bottom
SJ20  [SJ_2S]  115.32,19.56 270 top
SJ21  [SJ_2S-NO]  104.2,16.7 270 bottom
SJ22  [SJ_2S-NO]  18.13,47.69 90 bottom
SJ23  [SJ_2S]  20.83,50.55 270 top
SJ24  [SJ_2S-NO]  9.72,47.69 270 bottom
SJ25  [SJ_2S-NO]  33.88,47.69 90 bottom
SJ26  [SJ_2S]  36.58,50.55 270 top
SJ27  [SJ_2S-NO]  25.46,47.69 270 bottom
SJ28  [SJ_2S-NO]  49.63,47.69 90 bottom
SJ29  [SJ_2S]  52.32,50.55 270 top
SJ30  [SJ_2S-NO]  41.21,47.69 270 bottom
SJ31  [SJ_2S-NO]  65.37,47.69 90 bottom
SJ32  [SJ_2S]  68.07,50.55 270 top
SJ33  [SJ_2S-NO]  56.96,47.69 270 bottom
SJ34  [SJ_2S-NO]  81.12,47.69 90 bottom
SJ35  [SJ_2S]  83.82,50.55 270 top
SJ36  [SJ_2S-NO]  72.71,47.69 270 bottom
SJ37  [SJ_2S-NO]  96.87,47.69 90 bottom
SJ38  [SJ_2S]  99.57,50.55 270 top
SJ39  [SJ_2S-NO]  88.46,47.69 270 bottom
SJ40  [SJ_2S-NO]  112.62,47.69 90 bottom
SJ41  [SJ_2S]  115.32,50.55 270 top
SJ42  [SJ_2S-NO]  104.2,47.69 270 bottom
SJ43  [SJ_2S-NO]  18.13,78.68 90 bottom
SJ44  [SJ_2S]  20.83,81.53 270 top
SJ45  [SJ_2S-NO]  9.72,78.68 270 bottom
SJ46  [SJ_2S-NO]  33.88,78.68 90 bottom
SJ47  [SJ_2S]  36.58,81.53 270 top
SJ48  [SJ_2S-NO]  25.46,78.68 270 bottom
SJ49  [SJ_2S-NO]  49.63,78.68 90 bottom
SJ50  [SJ_2S]  52.32,81.53 270 top
SJ51  [SJ_2S-NO]  41.21,78.68 270 bottom
SJ52  [SJ_2S-NO]  65.37,78.68 90 bottom
SJ53  [SJ_2S]  68.07,81.53 270 top
SJ54  [SJ_2S-NO]  56.96,78.68 270 bottom
SJ55  [SJ_2S-NO]  81.12,78.68 90 bottom
SJ56  [SJ_2S]  83.82,81.53 270 top
SJ57  [SJ_2S-NO]  72.71,78.68 270 bottom
SJ58  [SJ_2S-NO]  96.87,78.68 90 bottom
SJ59  [SJ_2S]  99.57,81.53 270 top
SJ60  [SJ_2S-NO]  88.46,78.68 270 bottom
SJ61  [SJ_2S-NO]  112.62,78.68 90 bottom
SJ62  [SJ_2S]  115.32,81.53 270 top
SJ63  [SJ_2S-NO]  104.2,78.68 270 bottom
U1  LTC4150  [MSOP10]  14.48,20.83 180 top
U2  LTC4150  [MSOP10]  30.23,20.83 180 top
U3  LTC4150  [MSOP10]  45.97,20.83 180 top
U4  LTC4150  [MSOP10]  61.72,20.83 180 top
U5  LTC4150  [MSOP10]  77.47,20.83 180 top
U6  LTC4150  [MSOP10]  93.22,20.83 180 top
U7  LTC4150  [MSOP10]  108.97,20.83 180 top
U8  LTC4150  [MSOP10]  14.48,51.82 180 top
U9  LTC4150  [MSOP10]  30.23,51.82 180 top
U10  LTC4150  [MSOP10]  45.97,51.82 180 top
U11  LTC4150  [MSOP10]  61.72,51.82 180 top
U12  LTC4150  [MSOP10]  77.47,51.82 180 top
U13  LTC4150  [MSOP10]  93.22,51.82 180 top
U14  LTC4150  [MSOP10]  108.97,51.82 180 top
U15  LTC4150  [MSOP10]  14.48,82.8 180 top
U16  LTC4150  [MSOP10]  30.23,82.8 180 top
U17  LTC4150  [MSOP10]  45.97,82.8 180 top
U18  LTC4150  [MSOP10]  61.72,82.8 180 top
U19  LTC4150  [MSOP10]  77.47,82.8 180 top
U20  LTC4150  [MSOP10]  93.22,82.8 180 top
U21  LTC4150  [MSOP10]  108.97,82.8 180 top

## Library data of the parts
C1-C42 R1-R189 SJ1-SJ63 = SparkFun-Passives
E$1 = SparkFun-Retired
E$4 E$5 FID1-FID42 LOGO1-LOGO63 = SparkFun-Aesthetics
JP1 JP5 JP9 JP13 JP17 JP21 JP25 JP29 JP33 JP37 JP41 JP45 JP49 JP53 JP57 JP61 JP65 JP69 JP73 JP77 JP81 = SparkFun-Connectors; PROD_ID: CONN-08352
JP2-JP4 JP6-JP8 JP10-JP12 JP14-JP16 JP18-JP20 JP22-JP24 JP26-JP28 JP30-JP32 JP34-JP36 JP38-JP40 JP42-JP44 JP46-JP48 JP50-JP52 JP54-JP56 JP58-JP60 JP62-JP64 JP66-JP68 JP70-JP72 JP74-JP76 JP78-JP80 JP82-JP84 = SparkFun-Connectors
U1-U21 = mike-temp

## Nets
!CLR!: JP4.5 R4.2 SJ1.1 SJ2.2
!CLR!1: JP8.5 R16.2 SJ4.2 SJ5.1
!CLR!2: JP12.5 R25.2 SJ7.2 SJ8.1
!CLR!3: JP16.5 R34.2 SJ10.2 SJ11.1
!CLR!4: JP20.5 R43.2 SJ13.2 SJ14.1
!CLR!5: JP24.5 R52.2 SJ16.2 SJ17.1
!CLR!6: JP28.5 R61.2 SJ19.2 SJ20.1
!CLR!7: JP32.5 R70.2 SJ22.2 SJ23.1
!CLR!8: JP36.5 R79.2 SJ25.2 SJ26.1
!CLR!9: JP40.5 R88.2 SJ28.2 SJ29.1
!CLR!10: JP44.5 R97.2 SJ31.2 SJ32.1
!CLR!11: JP48.5 R106.2 SJ34.2 SJ35.1
!CLR!12: JP52.5 R115.2 SJ37.2 SJ38.1
!CLR!13: JP56.5 R124.2 SJ40.2 SJ41.1
!CLR!14: JP60.5 R133.2 SJ43.2 SJ44.1
!CLR!15: JP64.5 R142.2 SJ46.2 SJ47.1
!CLR!16: JP68.5 R151.2 SJ49.2 SJ50.1
!CLR!17: JP72.5 R160.2 SJ52.2 SJ53.1
!CLR!18: JP76.5 R169.2 SJ55.2 SJ56.1
!CLR!19: JP80.5 R178.2 SJ58.2 SJ59.1
!CLR!20: JP84.5 R187.2 SJ61.2 SJ62.1
!INT!: JP4.2 R5.1 SJ1.2 U1.10
!INT!1: JP8.2 R11.1 SJ5.2 U2.10
!INT!2: JP12.2 R20.1 SJ8.2 U3.10
!INT!3: JP16.2 R29.1 SJ11.2 U4.10
!INT!4: JP20.2 R38.1 SJ14.2 U5.10
!INT!5: JP24.2 R47.1 SJ17.2 U6.10
!INT!6: JP28.2 R56.1 SJ20.2 U7.10
!INT!7: JP32.2 R65.1 SJ23.2 U8.10
!INT!8: JP36.2 R74.1 SJ26.2 U9.10
!INT!9: JP40.2 R83.1 SJ29.2 U10.10
!INT!10: JP44.2 R92.1 SJ32.2 U11.10
!INT!11: JP48.2 R101.1 SJ35.2 U12.10
!INT!12: JP52.2 R110.1 SJ38.2 U13.10
!INT!13: JP56.2 R119.1 SJ41.2 U14.10
!INT!14: JP60.2 R128.1 SJ44.2 U15.10
!INT!15: JP64.2 R137.1 SJ47.2 U16.10
!INT!16: JP68.2 R146.1 SJ50.2 U17.10
!INT!17: JP72.2 R155.1 SJ53.2 U18.10
!INT!18: JP76.2 R164.1 SJ56.2 U19.10
!INT!19: JP80.2 R173.1 SJ59.2 U20.10
!INT!20: JP84.2 R182.1 SJ62.2 U21.10
!SHDN!: JP4.6 R8.2 R9.1 SJ3.2
!SHDN!1: JP8.6 R13.2 R18.1 SJ6.2
!SHDN!2: JP12.6 R22.2 R27.1 SJ9.2
!SHDN!3: JP16.6 R31.2 R36.1 SJ12.2
!SHDN!4: JP20.6 R40.2 R45.1 SJ15.2
!SHDN!5: JP24.6 R49.2 R54.1 SJ18.2
!SHDN!6: JP28.6 R58.2 R63.1 SJ21.2
!SHDN!7: JP32.6 R67.2 R72.1 SJ24.2
!SHDN!8: JP36.6 R76.2 R81.1 SJ27.2
!SHDN!9: JP40.6 R85.2 R90.1 SJ30.2
!SHDN!10: JP44.6 R94.2 R99.1 SJ33.2
!SHDN!11: JP48.6 R103.2 R108.1 SJ36.2
!SHDN!12: JP52.6 R112.2 R117.1 SJ39.2
!SHDN!13: JP56.6 R121.2 R126.1 SJ42.2
!SHDN!14: JP60.6 R130.2 R135.1 SJ45.2
!SHDN!15: JP64.6 R139.2 R144.1 SJ48.2
!SHDN!16: JP68.6 R148.2 R153.1 SJ51.2
!SHDN!17: JP72.6 R157.2 R162.1 SJ54.2
!SHDN!18: JP76.6 R166.2 R171.1 SJ57.2
!SHDN!19: JP80.6 R175.2 R180.1 SJ60.2
!SHDN!20: JP84.6 R184.2 R189.1 SJ63.2
GND: C1.2 JP1.1 JP2.1 JP3.1 JP4.4 R3.1 R6.1 U1.7
GND1: C4.2 JP5.1 JP6.1 JP7.1 JP8.4 R12.1 R14.1 U2.7
GND2: C6.2 JP9.1 JP10.1 JP11.1 JP12.4 R21.1 R23.1 U3.7
GND3: C8.2 JP13.1 JP14.1 JP15.1 JP16.4 R30.1 R32.1 U4.7
GND4: C10.2 JP17.1 JP18.1 JP19.1 JP20.4 R39.1 R41.1 U5.7
GND5: C12.2 JP21.1 JP22.1 JP23.1 JP24.4 R48.1 R50.1 U6.7
GND6: C14.2 JP25.1 JP26.1 JP27.1 JP28.4 R57.1 R59.1 U7.7
GND7: C16.2 JP29.1 JP30.1 JP31.1 JP32.4 R66.1 R68.1 U8.7
GND8: C18.2 JP33.1 JP34.1 JP35.1 JP36.4 R75.1 R77.1 U9.7
GND9: C20.2 JP37.1 JP38.1 JP39.1 JP40.4 R84.1 R86.1 U10.7
GND10: C22.2 JP41.1 JP42.1 JP43.1 JP44.4 R93.1 R95.1 U11.7
GND11: C24.2 JP45.1 JP46.1 JP47.1 JP48.4 R102.1 R104.1 U12.7
GND12: C26.2 JP49.1 JP50.1 JP51.1 JP52.4 R111.1 R113.1 U13.7
GND13: C28.2 JP53.1 JP54.1 JP55.1 JP56.4 R120.1 R122.1 U14.7
GND14: C30.2 JP57.1 JP58.1 JP59.1 JP60.4 R129.1 R131.1 U15.7
GND15: C32.2 JP61.1 JP62.1 JP63.1 JP64.4 R138.1 R140.1 U16.7
GND16: C34.2 JP65.1 JP66.1 JP67.1 JP68.4 R147.1 R149.1 U17.7
GND17: C36.2 JP69.1 JP70.1 JP71.1 JP72.4 R156.1 R158.1 U18.7
GND18: C38.2 JP73.1 JP74.1 JP75.1 JP76.4 R165.1 R167.1 U19.7
GND19: C40.2 JP77.1 JP78.1 JP79.1 JP80.4 R174.1 R176.1 U20.7
GND20: C42.2 JP81.1 JP82.1 JP83.1 JP84.4 R183.1 R185.1 U21.7
IN: JP1.2 JP2.2 R1.1 R2.P$1 U1.2
IN1: JP5.2 JP6.2 R10.1 R17.P$1 U2.2
IN2: JP9.2 JP10.2 R19.1 R26.P$1 U3.2
IN3: JP13.2 JP14.2 R28.1 R35.P$1 U4.2
IN4: JP17.2 JP18.2 R37.1 R44.P$1 U5.2
IN5: JP21.2 JP22.2 R46.1 R53.P$1 U6.2
IN6: JP25.2 JP26.2 R55.1 R62.P$1 U7.2
IN7: JP29.2 JP30.2 R64.1 R71.P$1 U8.2
IN8: JP33.2 JP34.2 R73.1 R80.P$1 U9.2
IN9: JP37.2 JP38.2 R82.1 R89.P$1 U10.2
IN10: JP41.2 JP42.2 R91.1 R98.P$1 U11.2
IN11: JP45.2 JP46.2 R100.1 R107.P$1 U12.2
IN12: JP49.2 JP50.2 R109.1 R116.P$1 U13.2
IN13: JP53.2 JP54.2 R118.1 R125.P$1 U14.2
IN14: JP57.2 JP58.2 R127.1 R134.P$1 U15.2
IN15: JP61.2 JP62.2 R136.1 R143.P$1 U16.2
IN16: JP65.2 JP66.2 R145.1 R152.P$1 U17.2
IN17: JP69.2 JP70.2 R154.1 R161.P$1 U18.2
IN18: JP73.2 JP74.2 R163.1 R170.P$1 U19.2
IN19: JP77.2 JP78.2 R172.1 R179.P$1 U20.2
IN20: JP81.2 JP82.2 R181.1 R188.P$1 U21.2
N$1: R3.2 R4.1 SJ2.1 U1.9
N$2: C3.1 U2.3
N$3: C2.1 U1.3
N$4: C2.2 U1.4
N$5: C3.2 U2.4
N$6: R13.1 R14.2 SJ6.1 U2.5
N$7: R12.2 R16.1 SJ4.1 U2.9
N$8: C5.1 U3.3
N$9: R6.2 R8.1 SJ3.1 U1.5
N$10: C5.2 U3.4
N$11: R22.1 R23.2 SJ9.1 U3.5
N$12: R21.2 R25.1 SJ7.1 U3.9
N$13: C7.1 U4.3
N$14: C7.2 U4.4
N$15: R31.1 R32.2 SJ12.1 U4.5
N$16: R30.2 R34.1 SJ10.1 U4.9
N$17: C9.1 U5.3
N$18: C9.2 U5.4
N$19: R40.1 R41.2 SJ15.1 U5.5
N$20: R39.2 R43.1 SJ13.1 U5.9
N$21: C11.1 U6.3
N$22: C11.2 U6.4
N$23: R49.1 R50.2 SJ18.1 U6.5
N$24: R48.2 R52.1 SJ16.1 U6.9
N$25: C13.1 U7.3
N$26: C13.2 U7.4
N$27: R58.1 R59.2 SJ21.1 U7.5
N$28: R57.2 R61.1 SJ19.1 U7.9
N$29: C15.1 U8.3
N$30: C15.2 U8.4
N$31: R67.1 R68.2 SJ24.1 U8.5
N$32: R66.2 R70.1 SJ22.1 U8.9
N$33: C17.1 U9.3
N$34: C17.2 U9.4
N$35: R76.1 R77.2 SJ27.1 U9.5
N$36: R75.2 R79.1 SJ25.1 U9.9
N$37: C19.1 U10.3
N$38: C19.2 U10.4
N$39: R85.1 R86.2 SJ30.1 U10.5
N$40: R84.2 R88.1 SJ28.1 U10.9
N$41: C21.1 U11.3
N$42: C21.2 U11.4
N$43: R94.1 R95.2 SJ33.1 U11.5
N$44: R93.2 R97.1 SJ31.1 U11.9
N$45: C23.1 U12.3
N$46: C23.2 U12.4
N$47: R103.1 R104.2 SJ36.1 U12.5
N$48: R102.2 R106.1 SJ34.1 U12.9
N$49: C25.1 U13.3
N$50: C25.2 U13.4
N$51: R112.1 R113.2 SJ39.1 U13.5
N$52: R111.2 R115.1 SJ37.1 U13.9
N$53: C27.1 U14.3
N$54: C27.2 U14.4
N$55: R121.1 R122.2 SJ42.1 U14.5
N$56: R120.2 R124.1 SJ40.1 U14.9
N$57: C29.1 U15.3
N$58: C29.2 U15.4
N$59: R130.1 R131.2 SJ45.1 U15.5
N$60: R129.2 R133.1 SJ43.1 U15.9
N$61: C31.1 U16.3
N$62: C31.2 U16.4
N$63: R139.1 R140.2 SJ48.1 U16.5
N$64: R138.2 R142.1 SJ46.1 U16.9
N$65: C33.1 U17.3
N$66: C33.2 U17.4
N$67: R148.1 R149.2 SJ51.1 U17.5
N$68: R147.2 R151.1 SJ49.1 U17.9
N$69: C35.1 U18.3
N$70: C35.2 U18.4
N$71: R157.1 R158.2 SJ54.1 U18.5
N$72: R156.2 R160.1 SJ52.1 U18.9
N$73: C37.1 U19.3
N$74: C37.2 U19.4
N$75: R166.1 R167.2 SJ57.1 U19.5
N$76: R165.2 R169.1 SJ55.1 U19.9
N$77: C39.1 U20.3
N$78: C39.2 U20.4
N$79: R175.1 R176.2 SJ60.1 U20.5
N$80: R174.2 R178.1 SJ58.1 U20.9
N$81: C41.1 U21.3
N$82: C41.2 U21.4
N$83: R184.1 R185.2 SJ63.1 U21.5
N$84: R183.2 R187.1 SJ61.1 U21.9
OUT: C1.1 JP3.2 R1.2 R2.P$2 U1.1 U1.8
OUT1: C4.1 JP7.2 R10.2 R17.P$2 U2.1 U2.8
OUT2: C6.1 JP11.2 R19.2 R26.P$2 U3.1 U3.8
OUT3: C8.1 JP15.2 R28.2 R35.P$2 U4.1 U4.8
OUT4: C10.1 JP19.2 R37.2 R44.P$2 U5.1 U5.8
OUT5: C12.1 JP23.2 R46.2 R53.P$2 U6.1 U6.8
OUT6: C14.1 JP27.2 R55.2 R62.P$2 U7.1 U7.8
OUT7: C16.1 JP31.2 R64.2 R71.P$2 U8.1 U8.8
OUT8: C18.1 JP35.2 R73.2 R80.P$2 U9.1 U9.8
OUT9: C20.1 JP39.2 R82.2 R89.P$2 U10.1 U10.8
OUT10: C22.1 JP43.2 R91.2 R98.P$2 U11.1 U11.8
OUT11: C24.1 JP47.2 R100.2 R107.P$2 U12.1 U12.8
OUT12: C26.1 JP51.2 R109.2 R116.P$2 U13.1 U13.8
OUT13: C28.1 JP55.2 R118.2 R125.P$2 U14.1 U14.8
OUT14: C30.1 JP59.2 R127.2 R134.P$2 U15.1 U15.8
OUT15: C32.1 JP63.2 R136.2 R143.P$2 U16.1 U16.8
OUT16: C34.1 JP67.2 R145.2 R152.P$2 U17.1 U17.8
OUT17: C36.1 JP71.2 R154.2 R161.P$2 U18.1 U18.8
OUT18: C38.1 JP75.2 R163.2 R170.P$2 U19.1 U19.8
OUT19: C40.1 JP79.2 R172.2 R179.P$2 U20.1 U20.8
OUT20: C42.1 JP83.2 R181.2 R188.P$2 U21.1 U21.8
POL: JP4.3 R7.1 U1.6
POL1: JP8.3 R15.1 U2.6
POL2: JP12.3 R24.1 U3.6
POL3: JP16.3 R33.1 U4.6
POL4: JP20.3 R42.1 U5.6
POL5: JP24.3 R51.1 U6.6
POL6: JP28.3 R60.1 U7.6
POL7: JP32.3 R69.1 U8.6
POL8: JP36.3 R78.1 U9.6
POL9: JP40.3 R87.1 U10.6
POL10: JP44.3 R96.1 U11.6
POL11: JP48.3 R105.1 U12.6
POL12: JP52.3 R114.1 U13.6
POL13: JP56.3 R123.1 U14.6
POL14: JP60.3 R132.1 U15.6
POL15: JP64.3 R141.1 U16.6
POL16: JP68.3 R150.1 U17.6
POL17: JP72.3 R159.1 U18.6
POL18: JP76.3 R168.1 U19.6
POL19: JP80.3 R177.1 U20.6
POL20: JP84.3 R186.1 U21.6
VIO: JP4.1 R5.2 R7.2 R9.2
VIO1: JP8.1 R11.2 R15.2 R18.2
VIO2: JP12.1 R20.2 R24.2 R27.2
VIO3: JP16.1 R29.2 R33.2 R36.2
VIO4: JP20.1 R38.2 R42.2 R45.2
VIO5: JP24.1 R47.2 R51.2 R54.2
VIO6: JP28.1 R56.2 R60.2 R63.2
VIO7: JP32.1 R65.2 R69.2 R72.2
VIO8: JP36.1 R74.2 R78.2 R81.2
VIO9: JP40.1 R83.2 R87.2 R90.2
VIO10: JP44.1 R92.2 R96.2 R99.2
VIO11: JP48.1 R101.2 R105.2 R108.2
VIO12: JP52.1 R110.2 R114.2 R117.2
VIO13: JP56.1 R119.2 R123.2 R126.2
VIO14: JP60.1 R128.2 R132.2 R135.2
VIO15: JP64.1 R137.2 R141.2 R144.2
VIO16: JP68.1 R146.2 R150.2 R153.2
VIO17: JP72.1 R155.2 R159.2 R162.2
VIO18: JP76.1 R164.2 R168.2 R171.2
VIO19: JP80.1 R173.2 R177.2 R180.2
VIO20: JP84.1 R182.2 R186.2 R189.2